# Altium PCB DesignPCB.PcbDoc
Units mm, origin at the board's own origin, x right, y up, seen from the top; angles counter-clockwise.
Board outline 152.4 x 101.6 mm, 2 copper layers (Top Layer, Bottom Layer); 6 components, 4 nets, 13 pads, 0 vias.
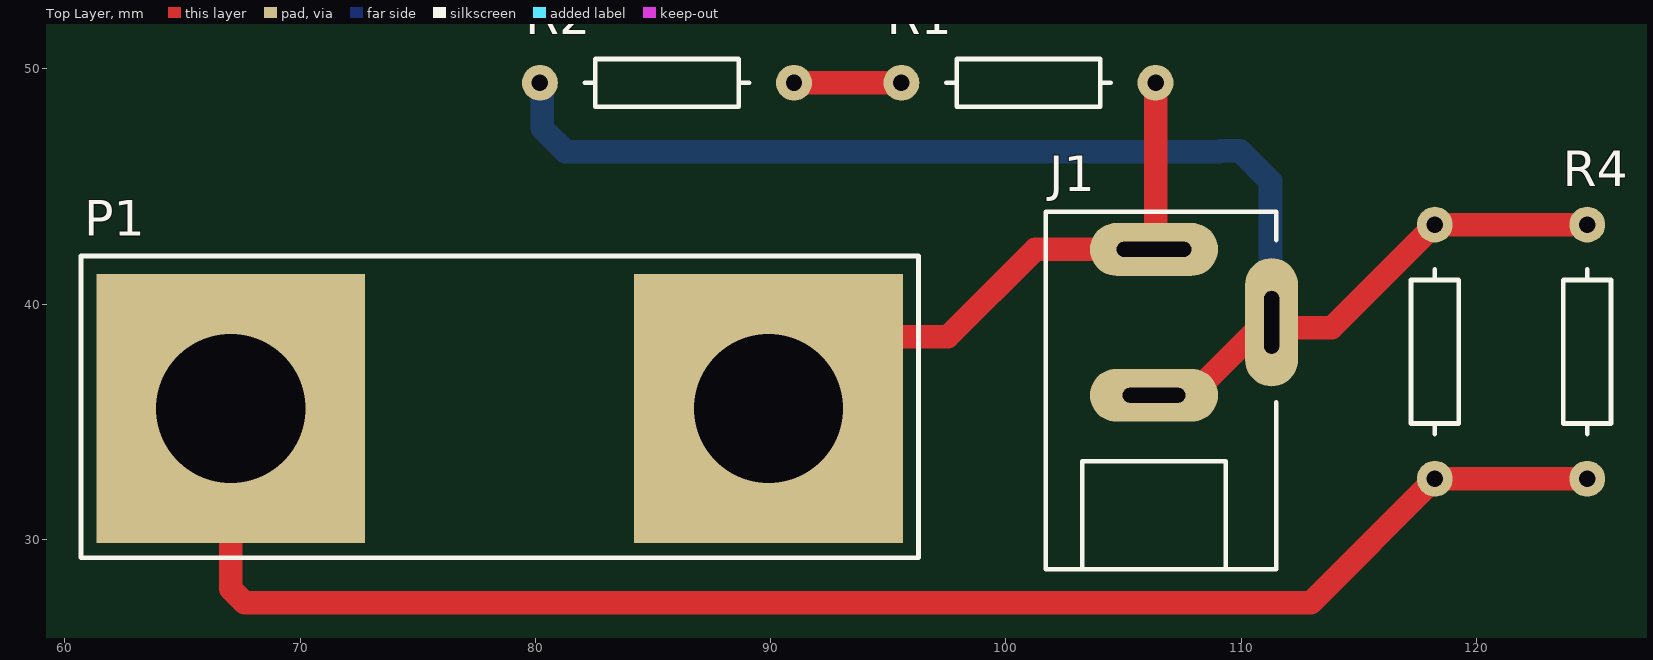
[diagram p0: Top Layer view]
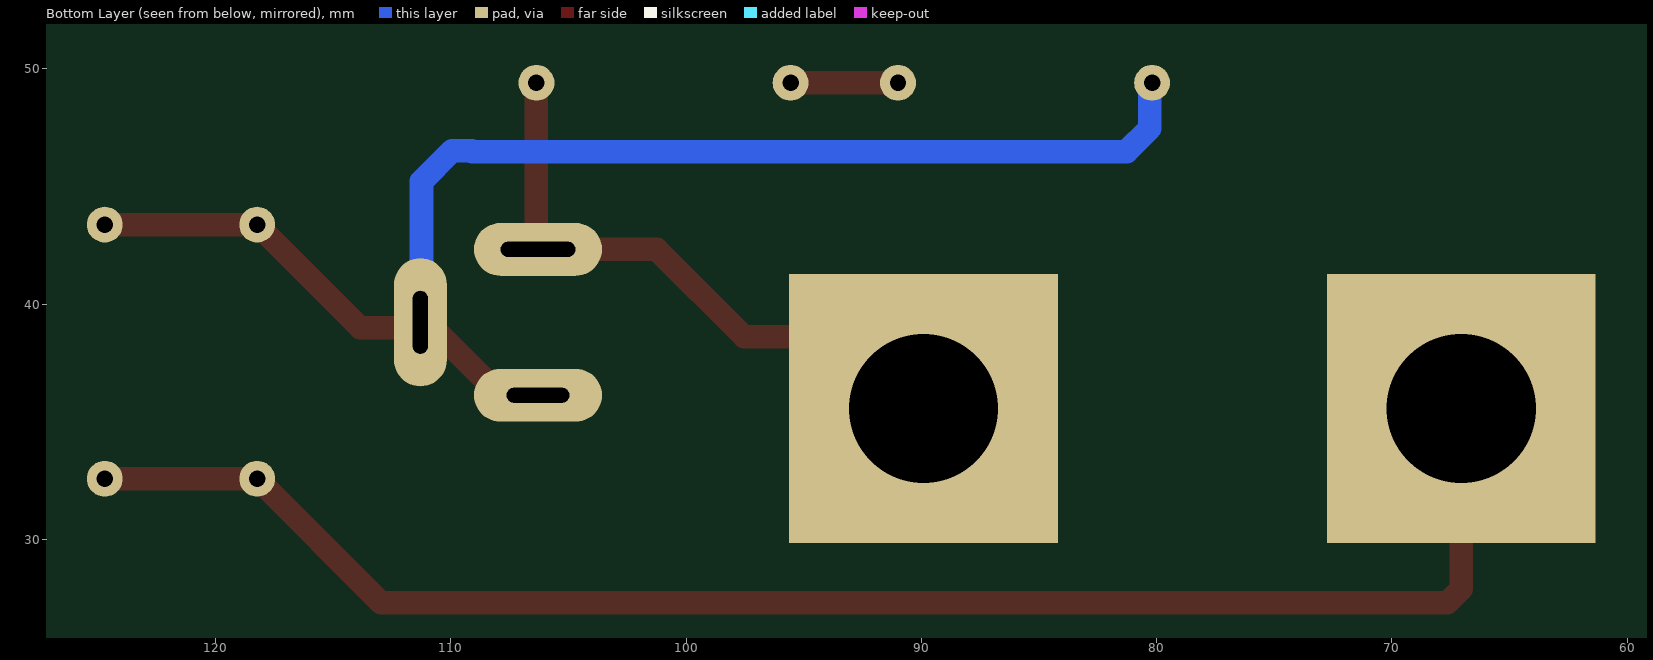
[diagram p1: Bottom Layer view, seen from below]
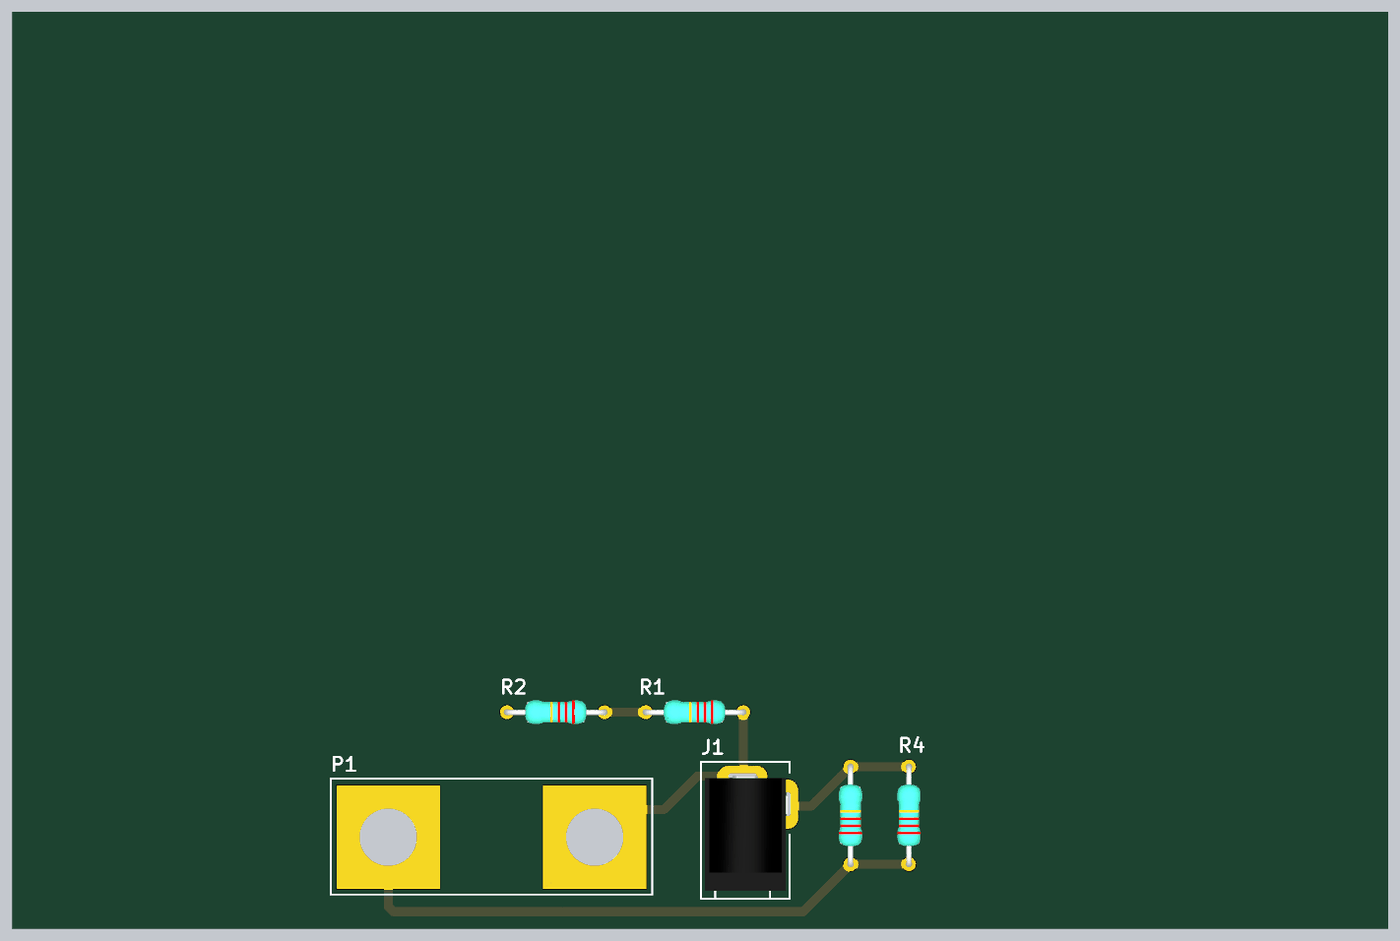
[diagram p2: 3D render of the assembled board from above, using the file's embedded part models]

## Layer stack, top to bottom
Top Solder: solder mask 0.0102, Solder Resist, Dk 3.5
Top Layer: signal copper 0.0356
Dielectric 1: dielectric 0.32, FR-4, Dk 4.8
Bottom Layer: signal copper 0.0356
Bottom Solder: solder mask 0.0102, Solder Resist, Dk 3.5

## Board outline
25.4,25.4 177.8,25.4 177.8,127 25.4,127

## Design rules (kind name [scope] priority, off if disabled: settings)
Clearance [All] p1: gap=0.5 ignorepadtopadclearanceinfootprint=FALSE
Height [All] p1: minheight=0 maxheight=100 prefheight=12.7
HoleSize [All] p1: absolutevalues=TRUE maxlimit=10 minlimit=0.5 maxpercent=80.000 minpercent=20.000
PolygonConnect [All] p1: connectstyle=Relief reliefconductorwidth=0.5 reliefentries=4 polygonreliefangle="90 Angle" airgapwidth=0.5
RoutingVias [All] p1: holewidth=0.711 width=1.27 viastyle="Through Hole" minholewidth=0.711 minwidth=1.27 maxholewidth=0.711 maxwidth=1.27
SilkToSilkClearance [All] p1: silktosilkclearance=0.1
SilkToSolderMaskClearance [IsPad] p1: minsilkscreentomaskgap=0.1 clearancetoexposedcopper=TRUE
SolderMaskExpansion [All] p1: expansion=0.102 istentingtop=FALSE
Width [All] p1: maxlimit=10 minlimit=0.5 preferedwidth=1
26 further rules are at their usual default settings.

## Components (designator, comment, footprint, x,y, rotation, side; value= is the part's Value field where it differs from the comment)
J1 "DC barrel jack" AC-Socket 106.299,36.322 r90 top value=socket
P1 "Dual Banana Plugs" "Dual Banana Plug" 78.486,35.56 r180 top
R1 "820k" AXIAL-0.4 100.965,49.403 r180 top
R2 "39k" AXIAL-0.4 85.598,49.403 r180 top
R3 "1R0" AXIAL-0.4 118.237,37.973 r90 top
R4 "1R0" AXIAL-0.4 124.714,37.973 r90 top

## Footprints (in the part's own frame and the unit in brackets; to place one, negate y for a bottom-side part, rotate by r counter-clockwise, add the part's x,y. Pads: shape width x height; smd on the part's side, far side on the other; paste and mask are expansions set on the pad)
AC-Socket [mm]
  oval 2.25x5.45 hole 0.635 slot 3.175 at 90 deg: 1(6,0)
  oval 5.45x2.25 hole 0.635 slot 2.667 at 0 deg: 2(2.9,-5)
  oval 2.25x5.45 hole 0.635 slot 2.667 at 90 deg: 3(-0.2,0)
  silkscreen extent -7.6,-5.2 7.6,4.6, body extent -6.7,-5 6,4.2, height 10.5
AXIAL-0.4 [mm]
  round 1.524 hole 0.7: 1(-5.4,0) 2(5.4,0)
  silkscreen extent -3.5,-1.02 3.5,1.02, body extent -5.7,-1.3 5.7,1.3, height 2.7
"Dual Banana Plug" [mm] "Connector; 2 Position"
  rect 11.43x11.43 hole 6.35: 1(-11.43,0) 2(11.43,0)
  silkscreen extent -17.8,-6.48 17.8,6.35, body extent -17.38,-5.99 17.43,5.99, height 5.5

## Part data
J1: library part AC_Input, "DC barrel jack connection to AC source"
P1: library part AC_Output, "Dual banana plugs connection to the AC load", LatestRevisionDate=17-Jul-2002, LatestRevisionNote="Re-released for DXP Platform.", Publisher="Altium Limited"
R1 R2 R3 R4: library part Res_TH_0AX4, "Through hole resistor", ComponentLink1Description=http://www.royalohm.com/pdf/product2017/PrecisionMetalMF.pdf, LatestRevisionDate=17-Jul-2002, LatestRevisionNote="Re-released for DXP Platform.", PackageReference=AXIAL-0.4, Published=8-Jun-2000, Publisher="Altium Limited"

## Nets (pads, with @x,y where several pads share a name; then routed paths per layer and width w, separated by ;. In a path a pad name is that pad's centre, name@x,y a point inside that pad or via, vN(x,y) a via of type N, cw(c..) or ccw(c..) an arc to the next point about the centre after c; other vN are vias at no path point)
GND: J1.2 J1.3 R2.2 R3.2 R4.2 | length 61.3
  Top Layer w1: J1.3 107.899,36.122 110.766,38.989 113.853,38.989 R3.2 R4.2
  Bottom Layer w1: R2.2 80.298,49.303 80.298,47.464 81.28,46.482 109.093,46.482 109.123,46.512 109.952,46.512 111.252,45.212 111.252,39.269 J1.2
Vac: J1.1 P1.1 R1.1 | length 26.3
  Top Layer w1: P1.1 92.964,38.608 97.536,38.608 101.25,42.322 J1.1 106.365,42.388 R1.1
Vis: P1.2 R3.1 R4.1 | length 67.8
  Top Layer w1: P1.2 67.056,27.891 67.642,27.305 112.969,27.305 R3.1 R4.1
Vvs: R1.2 R2.1 | length 4.6
  Top Layer w1: R2.1 R1.2